# Altium PCB MotherBoard2(1).PcbDoc
Units mil, origin at the board's own origin, x right, y up, seen from the top; angles counter-clockwise.
Board outline 2202.7 x 1707.7 mil, 2 copper layers (Top Layer, Bottom Layer); 42 components, 29 nets, 173 pads, 38 vias.
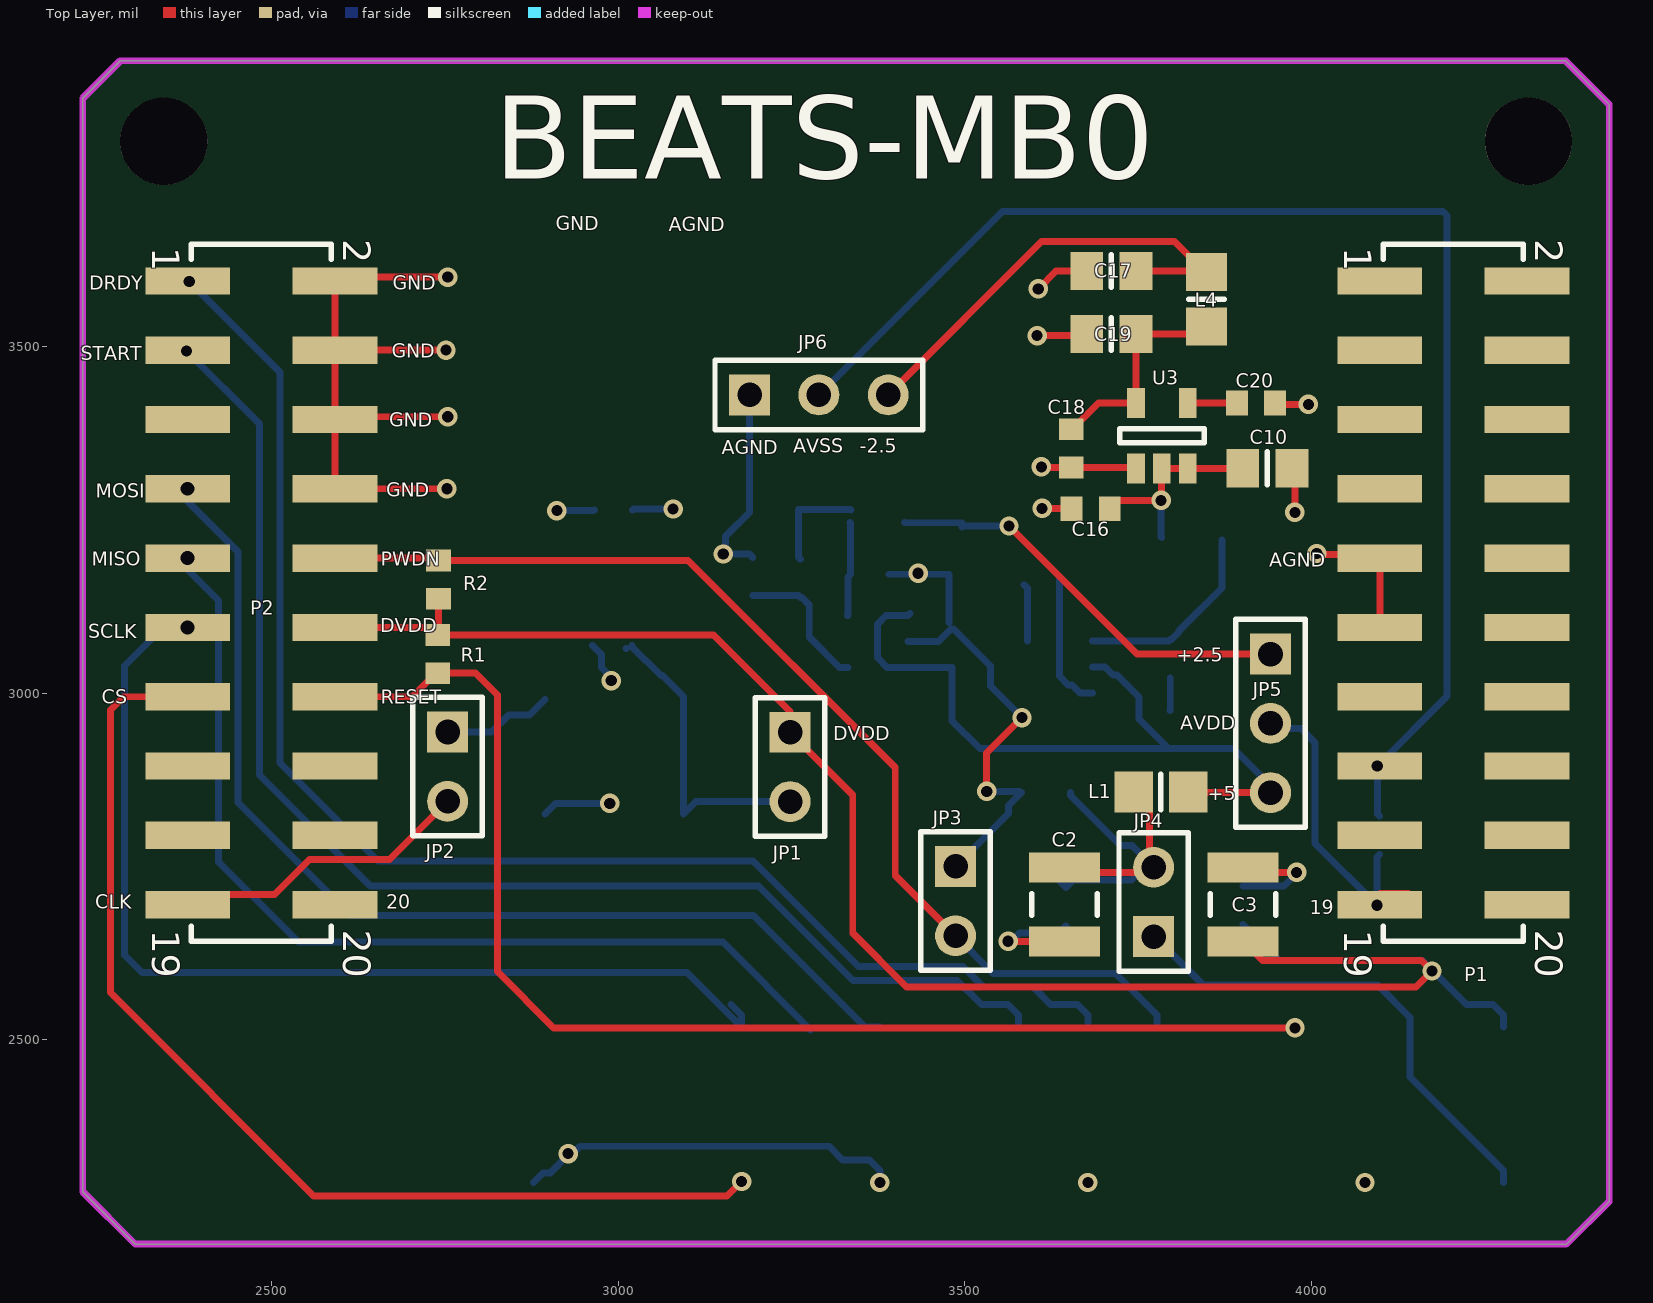
[diagram p0: Top Layer view]
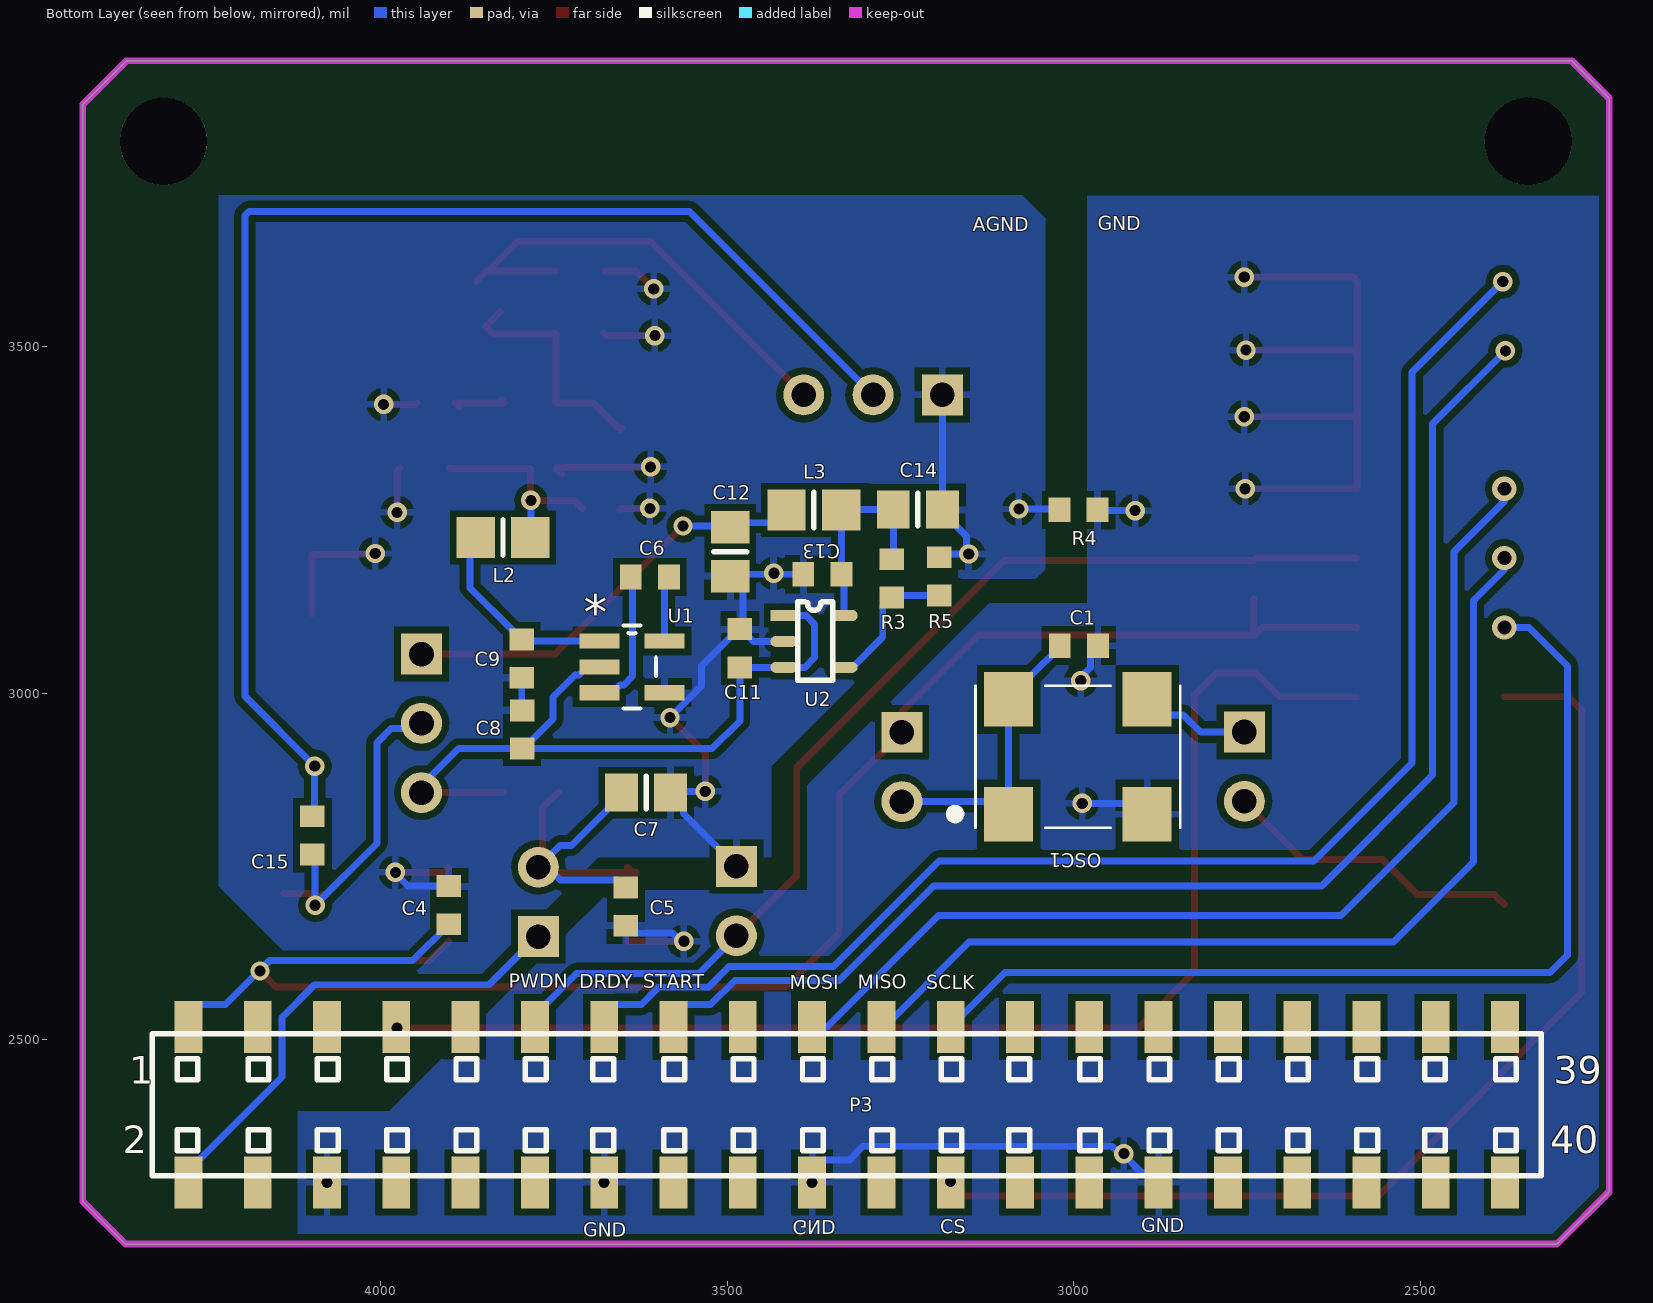
[diagram p1: Bottom Layer view, seen from below]

## Layer stack, top to bottom
Top Solder: solder mask 0.4, Solder Resist, Dk 3.5
Top Layer: signal copper 1.4
Dielectric 1: dielectric 12.6, FR-4, Dk 4.8
Bottom Layer: signal copper 1.4
Bottom Solder: solder mask 0.4, Solder Resist, Dk 3.5

## Board outline
2227.3,2280.7 2227.3,3858.6 2281.4,3912.7 4366.9,3912.7 4430,3849.6 4430,2266.6 4368.4,2205 2303,2205

## Design rules (kind name [scope] priority, off if disabled: settings)
Clearance [All] p1: gap=10 ignorepadtopadclearanceinfootprint=FALSE except(0: Arc-Hole Track-Hole SMDPad-Hole THPad-Hole Via-Hole Fill-Hole Poly-Hole Region-Hole Text-Hole)
PolygonConnect [All] p1: connectstyle=Relief reliefconductorwidth=10 reliefentries=4 polygonreliefangle="90 Angle" airgapwidth=10
RoutingVias [All] p1: holewidth=28 width=50 viastyle="Through Hole" minholewidth=28 minwidth=50 maxholewidth=28 maxwidth=50
SolderMaskExpansion [All] p1: expansion=4
Width [All] p1: maxlimit=10 minlimit=10 preferedwidth=10
30 further rules are at their usual default settings.

## Classes and differential pairs
component class power: C6 C7 C8 C9 C10 C11 C12 C13 C14 C15 C16 C17 C18 C19 C20 JP5 JP6 L3 L4 R3 R4 R5 U3
component class interface2pi: C2 C3 C4 C5 JP3 JP4 P3 R1 R2
component class clock: C1 JP1 JP2

## Components (designator, comment, footprint, x,y, rotation, side; value= is the part's Value field where it differs from the comment)
C1 "Cap" 1608[0603] 2992.6,3068.8 r0 bottom value=1uf
C2 "Cap" 14-1210 3643.7,2695.25 r90 top value=100uF
C3 "Cap" 14-1210 3901.8,2695.2 r270 top value=100uF
C4 "Cap" 1608[0603] 3901.8,2694.14 r270 bottom value=0.1uF
C5 "Cap" 1608[0603] 3646.2,2692.1 r90 bottom value=0.1uF
C6 "Cap" 1608[0603] 3611.8,3167.8 r0 bottom value=1uF
C7 "Cap" 6-0805_N 3617.2,2856.6 r0 bottom value=10uF
C8 "Cap" 1608[0603] 3795.9,2947.66 r270 bottom value=1uF
C9 "Cap" 1608[0603] 3796.5,3049.9 r90 bottom value=1uF
C10 "Cap" 6-0805_N 3936.63,3324.8 r180 top value=10uF
C11 "Cap" 1608[0603] 3481.84,3064.96 r270 bottom value=1uF
C12 "Cap" 6-0805_N 3495.8,3204.3 r90 bottom value=10uF
C13 "Cap" 1608[0603] 3362.8,3171.7 r180 bottom value=2.2uF
C14 "Cap" 6-0805_N 3224.87,3265 r0 bottom value=10uF
C15 "Cap" 1608[0603] 4098.7,2795.01 r270 bottom value=0.1uF
C16 "Cap" 1608[0603] 3681.7,3266.1 r0 top value=2.2uF
C17 "Cap" 6-0805_N 3711.57,3609.2 r0 top value=10uF
C18 "Cap" 1608[0603] 3653.4,3353.46 r90 top value=2.2uF
C19 "Cap" 6-0805_N 3711.6,3518.3 r0 top value=10uF
C20 "Cap" 1608[0603] 3920.26,3418.84 r180 top value=0.01uF
JP1 "Header 2" HDR1X2 3247.9,2943.7 r270 top
JP2 "Header 2" HDR1X2 2753.8,2944.1 r270 top
JP3 "Header 2" HDR1X2 3486.7,2750.1 r270 top
JP4 "Header 2" HDR1X2 3772.6,2648.9 r90 top
JP5 "Jumper" HDR1X3 3941.2,3056.6 r270 top
JP6 "Jumper" HDR1X3 3189.6,3430.5 r0 top
L1 "Inductor" 6-0805_M 3783.13,2857.5 r0 top value=3.3uH
L2 "Inductor" 6-0805_M 3823.6,3224.8 r180 bottom value=3.3uH
L3 "Inductor" 6-0805_M 3375,3264.6 r0 bottom value=3.3uH
L4 "Inductor" 6-0805_M 3848.7,3568.5 r90 top value=3.3uH
OSC1 "FXO-HC735-2.048" FXO-HC736R-40 2994.1,2908.4 r180 bottom
P1 "61002021121" 61002021121 4205,3145.01 r270 top
P2 "Header 10X2" 61002021121 2485,3145.01 r270 top
P3 "MHDR2X20" HDR2.54-M-LS-2x20P 3327.6,2406.2 r180 bottom
R1 "Res1" 1608[0603] 2739.3,3056.5 r90 top value=10k
R2 "Res1" 1608[0603] 2740.6,3164.06 r270 top value=10k
R3 "Res1" 1608[0603] 3262.9,3165.8 r270 bottom value=39.2K
R4 "Res1" 1608[0603] 2993.1,3264.6 r180 bottom value=0
R5 "Res1" 1608[0603] 3194.1,3168.64 r270 bottom value=36.5K
U1 "TPS60403QDBVRQ1" DBV5 3637.4,3038 r180 bottom
U2 "TPS73225DBVRG4" SOT23-5 3418,3112.2 r180 bottom
U3 "TPS72325DBVR" DBV0005A 3784.4,3371.6 r90 top

## Footprints (in the part's own frame and the unit in brackets; to place one, negate y for a bottom-side part, rotate by r counter-clockwise, add the part's x,y. Pads: shape width x height; smd on the part's side, far side on the other; paste and mask are expansions set on the pad)
6-0805_M [mm] "Chip Resistor, Body 2.0x1.2mm, IPC Low Density"
  rect 1.4x1.5 smd: 1(-1,0) 2(1,0)
  silkscreen extent 0,-0.65 0,0.65, body extent -1.07,-0.7 1.07,0.7, height 0.7
6-0805_N [mm] "Chip Resistor, Body 2.0x1.2mm, IPC Medium Density"
  rect 1.2x1.4 smd: 1(-0.9,0) 2(0.9,0)
  silkscreen extent 0,-0.6 0,0.6, body extent -1.07,-0.7 1.07,0.7, height 0.7
14-1210 [mm] "Chip Resistor, Body 3.2x2.5mm, IPC High Density"
  rect 1.1x2.6 smd: 1(-1.35,0) 2(1.35,0)
  silkscreen extent -0.4,-1.2 0.4,1.2, body extent -1.68,-1.32 1.68,1.32, height 0.9
1608[0603] [mm] "Chip Capacitor, Body 1.6x0.8mm, IPC High Density"
  rect 0.8x0.9 smd: 1(-0.7,0) 2(0.7,0)
  body extent -0.87,-0.48 0.87,0.48, height 1.3
61002021121 [mm] "Pin Header, pitch 2.54 mm, SMD, Vertical, dual row, 20p"
  rect 1x3.1 smd: 1(-11.43,-2.7) 2(-11.43,2.7) 3(-8.89,-2.7) 4(-8.89,2.7) 5(-6.35,-2.7) 6(-6.35,2.7) 7(-3.81,-2.7) 8(-3.81,2.7) 9(-1.27,-2.7) 10(-1.27,2.7) 11(1.27,-2.7) 12(1.27,2.7) 13(3.81,-2.7) 14(3.81,2.7) 15(6.35,-2.7) 16(6.35,2.7) 17(8.89,-2.7) 18(8.89,2.7) 19(11.43,-2.7) 20(11.43,2.7)
  silkscreen extent -12.78,-2.56 12.78,2.57, body extent -12.7,-3.75 12.7,3.75, height 9.62
DBV5 [mil]
  rect 58x22 smd: 1(-47,37.4) 2(-47,0) 3(-47,-37.4) 4(47,-37.4) 5(47,37.4)
  silkscreen extent -12,-60 34,60, body extent -59,-60 59,60, height 57
DBV0005A [mm]
  rect 1.1x0.65 smd paste-0.102 mask+0.051: 1(-1.2,0.95) 2(-1.2,0) 3(-1.2,-0.95) 4(1.2,-0.95) 5(1.2,0.95)
  silkscreen extent -0.25,-1.55 0.25,1.55, body extent 0,0 0.25,0.25, height 0.25
FXO-HC736R-40 [mm]
  rect 1.8x2 smd: 1(-2.54,-2.1) 2(2.54,-2.1) 3(2.54,2.1) 4(-2.54,2.1)
  silkscreen extent -4.64,-2.6 3.75,2.6
HDR1X2 [mm] "Connector; Header; 2 Position"
  rect 1.5x1.5 hole 0.9: 1(0,0)
  round 1.5 hole 0.9: 2(2.54,0)
  silkscreen extent -1.27,-1.27 3.81,1.27
HDR1X3 [mm] "Connector; Header; 3 Position"
  rect 1.5x1.5 hole 0.9: 1(0,0)
  round 1.5 hole 0.9: 2(2.54,0) 3(5.08,0)
  silkscreen extent -1.27,-1.27 6.35,1.27
HDR2.54-M-LS-2x20P [mm] "脚距：2.54mm，贴片双排母"
  rect 1.02x1.9 smd: 1(-24.13,2.85) 2(-24.13,-2.85) 3(-21.59,2.85) 4(-21.59,-2.85) 5(-19.05,2.85) 6(-19.05,-2.85) 7(-16.51,2.85) 8(-16.51,-2.85) 9(-13.97,2.85) 10(-13.97,-2.85) 11(-11.43,2.85) 12(-11.43,-2.85) 13(-8.89,2.85) 14(-8.89,-2.85) 15(-6.35,2.85) 16(-6.35,-2.85) 17(-3.81,2.85) 18(-3.81,-2.85) 19(-1.27,2.85) 20(-1.27,-2.85) 21(1.27,2.85) 22(1.27,-2.85) 23(3.81,2.85) 24(3.81,-2.85) 25(6.35,2.85) 26(6.35,-2.85) 27(8.89,2.85) 28(8.89,-2.85) 29(11.43,2.85) 30(11.43,-2.85) 31(13.97,2.85) 32(13.97,-2.85) 33(16.51,2.85) 34(16.51,-2.85) 35(19.05,2.85) 36(19.05,-2.85) 37(21.59,2.85) 38(21.59,-2.85) 39(24.13,2.85) 40(24.13,-2.85)
  silkscreen extent -25.46,-2.6 25.46,2.6, body extent -25.43,-3.2 25.43,3.2, height 5.15
SOT23-5 [mm]
  rect 1x0.4 smd: 1(0,0)
  oval 1x0.4 smd: 2(0,-0.95) 3(0,-1.9) 4(2.2,-1.9) 5(2.2,0)
  silkscreen extent 0.51,-2.38 1.78,0.51, body extent -0.26,-2.34 2.54,0.56, height 1.2

## Part data
C1 C2 C3 C4 C5 C6 C7 C8 C9 C10 C11 C12 C13 C14 C15 C16 C17 C18 C19 C20: "Capacitor", LatestRevisionDate=17-Jul-2002, LatestRevisionNote="Re-released for DXP Platform.", PackageDescription="Radial Cap, Thru-Hole; 2 Leads; 0.3 in Pin Spacing", PackageReference=RAD-0.3, Published=8-Jun-2000, Publisher="Altium Limited"
JP1 JP2 JP3 JP4: "Header, 2-Pin", LatestRevisionDate=17-Jul-2002, LatestRevisionNote="Re-released for DXP Platform.", Publisher="Altium Limited"
JP5 JP6: library part "Header 3", "Header, 3-Pin", LatestRevisionDate=17-Jul-2002, LatestRevisionNote="Re-released for DXP Platform.", Publisher="Altium Limited"
OSC1: "Crystal or Oscillator", Manufacturer_Name=IDT, Mouser Part Number=XPO-HC735-2.048, Datasheet Link=https://media.digikey.com/pdf/Data%20Sheets/Renesas/R7F7010293AFP_Web.pdf, Manufacturer_Part_Number=FXO-HC735-2.048, Mouser Price/Stock=https://www.mouser.com/Search/Refine.aspx?Keyword=XPO-HC735-2.048
P1: "SMT Vertical Pin Header WR-PHD, Pitch 2.54 mm, Dual Row, 20 pins", Contact Resistance="20 mOhm", Operating Temperature="-40 to 125 degC", Rated Current="3 A", Withstanding Voltage="500 VAC", Working Voltage="250 VAC", ComponentLink1Description=Manufacturer, ComponentLink1URL=http://www.we-online.de, ComponentLink2Description=Datasheet, ComponentLink2URL=https://katalog.we-online.de/em/datasheet/6100xx21121.pdf, Gender=Male, Mounting Technology=SMT, Orientation=Vertical, Packaging=Tube, Part Number=61002021121, Pin Number=20, Pitch="2.54 mm", Published Date="August 2018", Publisher="Wurth Elektronik", Row Number=Dual
P2: "Header, 10-Pin, Dual row", LatestRevisionDate=17-Jul-2002, LatestRevisionNote="Re-released for DXP Platform.", Publisher="Altium Limited"
P3: "Header, 20-Pin, Dual row", LatestRevisionDate=17-Jul-2002, LatestRevisionNote="Re-released for DXP Platform.", Publisher="Altium Limited"
R1 R2 R3 R4 R5: "Resistor", LatestRevisionDate=17-Jul-2002, LatestRevisionNote="Re-released for DXP Platform.", PackageDescription="Axial Device, Thru-Hole; 2 Leads; 0.3 in Pin Spacing", PackageReference=AXIAL-0.3, Published=8-Jun-2000, Publisher="Altium Limited"
U1: BOM_LCSC Assembly=Yes, BOM_Manufacturer=TI, BOM_Manufacturer Part=TPS60403QDBVRQ1, BOM_Supplier=LCSC, BOM_Supplier Part=C130215, Contributor=LCSC, SMT Type=Extend, spicePre=U, spiceSymbolName=TPS60403QDBVRQ1
L1 L2 L3 L4: Code_IEC=1005, Code_JEITA=0402, LatestRevisionDate=29-May-2009, LatestRevisionNote="IPC-7351 Footprint Added.", PackageDescription="Chip Inductor", PackageReference=0402-A, Published=8-Jun-2000, Publisher="Altium Limited"
U2: spicePre=U, spiceSymbolName=TPS73225DBVRG4

## Free pads (board coordinates)
  round 125.98 hole 125.98 unplated: 4(4313.4,3796.5) 5(2344.2,3796.5)

## Via types
v1: diameter 28, hole 16, Top Layer to Bottom Layer, 35 vias
v2: diameter 35, hole 20, Top Layer to Bottom Layer, tented both sides, 3 vias

## Nets (pads, with @x,y where several pads share a name; then routed paths per layer and width w, separated by ;. In a path a pad name is that pad's centre, name@x,y a point inside that pad or via, vN(x,y) a via of type N, cw(c..) or ccw(c..) an arc to the next point about the centre after c; other vN are vias at no path point)
+5: C2.2 C5.2 C7.2 JP4.2 L1.1 | length 600.9
  Top Layer w10: C2.2 C2.2@3636.4,2741.1 ; L1.1 3766.32,2834.94 3766.32,2755.18 JP4.2 JP4.2@3773.11,2749.41 ; JP4.2@3772.6,2741.1 C2.2@3636.4,2741.1 ; C2.2@3636.4,2741.1 3633.8,2738.5 3631.2,2741.1 C2.2@3636.4,2741.1
  Bottom Layer w10: C5.2@3635.45,2730.41 C5.2 3656.95,2730.41 3740.83,2730.41 3759.33,2748.9 JP4.2 3741.11,2780.39 3724.91,2780.39 3652.63,2852.66 C7.2
-5: C10.2 C16.2 L2.2 U3.2 U3.3 | length 305
  Top Layer w10: C16.2@3714.69,3271.53 C16.2 3709.26,3267.55 3720.01,3278.3 v1(3783.3,3278.3) 3783.85,3278.85 3783.85,3323.81 U3.2 U3.3 3900.76,3324.36 C10.2
  Bottom Layer w10: v1(3783.3,3278.3) 3783.3,3225.73 L2.2
AGND: C3.1 C4.1 C7.1 C8.1 C9.1 C10.1 C11.1 C12.1 C13.1 C14.1 C16.1 C17.1 C18.1 C19.1 C20.1 JP3.1 JP6.1 P1.9 P1.11 R4.1 R5.1 U1.4 U2.2 U3.1 | length 1953.6
  Top Layer w10: v1(3189.6,3430.5) JP6.1@3206.41,3447.31 ; v1(3531.7,2858.4) 3531.7,2914 v1(3582.6,2964.9) ; v1(3604.4,3516) 3673.87,3516 C19.1 C19.1@3677.74,3519.87 ; v1(3606.1,3583.6) 3631.7,3609.2 C17.1 ; v1(3610.6,3326.7) 3611.4,3325.9 C18.1 3745.45,3325.9 U3.1 U3.1@3739.2,3316.56 ; v1(3611.6,3266.8) 3653.44,3266.8 C16.1@3655.84,3264.4 ; C3.1 3908.55,2741.6 v1(3978.8,2741.6) ; C20.1 3949.76,3416.9 v1(3995.9,3416.9) ; C10.1 3976.3,3320.57 v1(3976.3,3261.1) ; v1@4007.8,3206.2 4013.66,3200.34 4098.46,3200.34 4099.4,3199.4 4099.4,3115.39
  Bottom Layer w10: R4.1 3021.96,3265.9 v1(3079.1,3265.9) ; v1(3189.6,3430.5) 3189.6,3265.17 C14.1 3189.43,3261.06 3154.94,3226.57 3154.94,3204.34 v1(3151.5,3200.9) 3189.4,3200.9 R5.1 ; C13.1 3477.05,3171.7 C11.1@3477.05,3102.41 ; U2.2 3462.16,3074.8 3479.87,3092.52 C11.1 3483.81,3092.52 3536.86,3039.47 3536.86,3010.64 v1(3582.6,2964.9) ; JP3.1 3563.14,2826.54 3563.14,2837.98 C7.1 3579.97,2858.4 v1(3531.7,2858.4) ; C8.1 3796.5,2975.82 C9.1 ; C4.1 3960.6,2721.7 v1@3982.55,2743.65
  other v1: 3432.8,3173.2 4007.9,3201.7
AVDD: C15.2 JP5.2 P1.19 | length 484.5
  Top Layer w10: P1.19@4084.02,2709.7 P1.19 ; P1.19@4099,2711 P1.19@4140.34,2711
  Bottom Layer w10: JP5.2 3948.7,2949.1 3985,2949.1 4005.5,2928.6 4005.5,2783.3 v1(4094.7,2694.1) 4094.7,2763.45 C15.2
AVSS: C15.1 JP6.2 P1.15 | length 1937.7
  Top Layer w10: P1.15@4092.39,2888.7 P1.15
  Bottom Layer w10: JP6.2 3554.5,3695.4 4190.24,3695.4 4196.1,3689.54 4196.1,2995.7 v1(4095.3,2894.9) 4095.3,2825.97 C15.1
DVDD: C3.2 C4.2 JP1.1 P2.12 P3.1 R1.2 R2.2 | length 2732.5
  Top Layer w10: P2.12@2591.58,3095.3 P2.12 2591.51,3094.81 2728.55,3094.81 R1.2 ; R2.2 2740.6,3085.36 R1.2 ; C3.2 3929.65,2614.2 4159.2,2614.2 v1(4174.2,2599.2) 4151.1,2576.1 3416.2,2576.1 3338.4,2653.9 3338.4,2853.2 JP1.1 3247.9,2973.6 3137.44,3084.06 R1.2
  Bottom Layer w10: C4.2 3954.18,2614.2 4160.49,2614.2 4223.89,2550.8 4262.52,2550.8 4277.6,2535.72 P3.1
GND: C1.1 C2.1 C5.1 OSC1.2 P2.2 P2.4 P2.6 P2.8 P3.6 P3.14 P3.20 P3.30 R4.2 | length 1896.7
  Top Layer w10: v1(2751.5,3495.2) 2591.49,3495.2 P2.4 ; v1(2752.8,3295.1) 2591.39,3295.1 P2.8 P2.6 ; v1(2754,3399) 2595.29,3399 P2.6 ; v1(2754,3600.4) 2596.69,3600.4 P2.2 P2.4 ; v1(3562.7,2642.1) 3643.1,2642.1 3643.4,2642.4 C2.1 ; P2.6 P2.4
  Bottom Layer w10: P3.30 2891.6,2307.99 2901.89,2307.99 2927.6,2333.7 v1(2927.6,2335.65) 2934.42,2335.65 2945.16,2346.39 3303.89,2346.39 3323.89,2326.39 3362.52,2326.39 3377.6,2311.31 v1(3377.6,2293.99) ; OSC1.2 2909.58,2841.2 v1(2987.8,2841.2) ; v1(2911.4,3263.5) 2964.44,3263.5 R4.2 ; C1.1@2962.5,3068.8 2963.07,3068.8 2975.79,3056.08 2975.79,3037.28 2989.9,3023.17 v1(2989.9,3018.3) ; v1(3562.7,2642.1) 3567.57,2642.1 3579.26,2653.79 3635.45,2653.79 C5.1
  other v1: 3677.6,2293.99 4077.6,2293.99
NetC1_2: C1.2 JP1.2 OSC1.1 OSC1.4 | length 441.4
  Bottom Layer w10: C1.2@3011.06,3064.5 C1.2@3011.84,3064.5 ; C1.2 3020.16,3066.83 3061.54,3025.45 3063.67,3025.45 3094.1,2995.01 OSC1.4 OSC1.1 3112.08,2843.7 JP1.2 JP1.2@3244.75,2840.55
NetC6_1: C6.1 U1.5 | length 83.2
  Bottom Layer w10: C6.1@3585.5,3156.6 3590.4,3151.7 U1.5
NetC6_2: C6.2 U1.3 | length 201
  Bottom Layer w10: C6.2@3636.5,3167.8 3636.5,3024.69 3649.19,3012 3655,3012 3666.4,3000.6 U1.3
NetC8_2: C8.2 C11.2 JP5.3 L1.2 U1.2 U2.1 U2.3 | length 1097.1
  Top Layer w10: L1.2 3823.4,2856.6 JP5.3
  Bottom Layer w10: U2.1@3420.87,3115.08 U2.1 3386.5,3112.2 3373.9,3099.6 3373.9,3051.6 3388.1,3037.4 U2.3 C11.2 3481.84,2960.06 3521.8,2920.1 C8.2@3793.93,2920.1 ; U1.2 3702.4,3038 3713.8,3026.6 3719.61,3026.6 3751.4,2994.81 3751.4,2962.63 C8.2@3793.93,2920.1 ; JP5.3 3941.2,2866.9 3888,2920.1 C8.2 C8.2@3793.93,2920.1
NetC9_2: C9.2 L2.1 U1.1 | length 288.4
  Bottom Layer w10: U1.1 3794.44,3075.4 C9.2 3798.47,3077.46 3809.22,3088.21 3809.22,3090.18 3871.1,3152.06 L2.1@3871.1,3220.9
NetC12_2: C12.2 JP5.1 L3.2 | length 605.7
  Top Layer w10: v1(3563.8,3241.3) 3748.5,3056.6 JP5.1
  Bottom Layer w10: L3.2@3412.87,3246.6 3413.47,3246 C12.2@3495.8,3246 ; C12.2 3497.37,3241.3 v1(3563.8,3241.3)
NetC13_2: C13.2 C14.2 L3.1 R3.1 U2.5 | length 285.2
  Bottom Layer w10: R3.1 3260.3,3195.96 C14.2 3335.23,3265 L3.1 ; U2.5@3330.99,3111.81 U2.5 3331.39,3167.84 C13.2 3335.24,3245.49 L3.1@3334.13,3246.6
NetC17_2: C17.2 JP6.3 L4.2 | length 687.1
  Top Layer w10: JP6.3 3610.86,3651.76 3802.84,3651.76 L4.2@3845.4,3609.2 ; C17.2 L4.2@3845.4,3609.2 ; L4.2@3862.65,3593.92 L4.2 3847.37,3609.2 L4.2@3845.4,3609.2
NetC18_2: C18.2 C19.2 L4.1 U3.5 | length 348
  Top Layer w10: C18.2@3651.63,3382.79 C18.2 3655.37,3381.02 3693.19,3418.84 U3.5 C19.2 ; C19.2 3837.87,3518.3 L4.1 L4.1@3827.05,3550.78
NetC20_2: C20.2 U3.4 | length 86.2
  Top Layer w10: U3.4@3826.53,3423.57 U3.4 C20.2 C20.2@3886.6,3412.74
NetJP2_1: JP2.1 OSC1.3 | length 159.8
  Bottom Layer w10: JP2.1 2817.3,2944.1 2841.98,2968.78 2871.8,2968.78 OSC1.3
NetJP2_2: JP2.2 P2.19 | length 450.1
  Top Layer w10: P2.19 2393.39,2709.7 2504.06,2709.7 2554.69,2760.33 2670.03,2760.33 JP2.2 JP2.2@2753.8,2830.83
NetJP3_2: JP3.2 P2.10 P3.11 R2.1 | length 1567.8
  Top Layer w10: P2.10 2737.2,3195.01 R2.1 3100.68,3191.62 3399.7,2892.6 3399.7,2737.1 JP3.2
  Bottom Layer w10: JP3.2 3541.04,2595.76 3717.57,2595.76 3777.6,2535.72 P3.11
NetJP4_1: JP4.1 P3.2 | length 710.9
  Bottom Layer w10: JP4.1@3774.2,2649.1 3843.9,2579.4 4095.29,2579.4 4142.52,2532.17 4142.52,2446.39 4277.6,2311.31 P3.2
NetP2_1: P2.1 P3.13 | length 2082.4
  Bottom Layer w10: v1(2381,3594.1) 2511.9,3463.2 2511.9,2899.66 2653.66,2757.9 3194.67,2757.9 3347,2605.57 3497.41,2605.57 3527.22,2575.76 3598.94,2575.76 3623.89,2550.8 3662.52,2550.8 3677.6,2535.72 P3.13
NetP2_3: P2.3 P3.15 | length 1911.8
  Bottom Layer w10: v1(2377.2,3494.1) 2482.4,3388.9 2482.4,2881.76 2642.16,2722 3202.28,2722 3338.71,2585.57 3489.12,2585.57 3523.89,2550.8 3562.52,2550.8 3577.6,2535.72 P3.15
NetP2_7: P2.7 P3.19 | length 1543
  Bottom Layer w10: v2(2378.7,3295.01) 2378.7,3277.1 2451.6,3204.2 2451.6,2842.5 2614.5,2679.6 3195.09,2679.6 3356.29,2518.4 P3.19
NetP2_9: P2.9 P3.21 | length 1414.9
  Bottom Layer w10: v2(2378.7,3195.01) 2378.7,3178.3 2423.4,3133.6 2423.4,2756.5 2538.8,2641.1 3150.86,2641.1 3277.71,2514.25 P3.21@3275.62,2516.73
NetP2_11: P2.11 P3.23 | length 1503.5
  Bottom Layer w10: v2(2378.7,3095.01) 2343.01,3095.01 2287.4,3039.4 2287.4,2622 2312.5,2596.9 3099.1,2596.9 P3.23 3177.6,2535.72 P3.23@3162.52,2550.8
NetP2_13: P2.13 P3.24 | length 1568
  Top Layer w10: P2.13 2286.51,2995.01 2267.3,2975.8 2267.3,2567.9 2560.5,2274.7 3157.2,2274.7 v1(3178,2295.5)
NetP2_14: P2.14 P3.7 R1.1 | length 1845.1
  Top Layer w10: P2.14 2703.4,2995.01 2737.33,3028.94 R1.1 2794.26,3028.94 2825.9,2997.3 2825.9,2598.2 2906.9,2517.2 v1(3976.6,2517.2)
NetR3_2: R3.2 R5.2 U2.4 | length 207.3
  Bottom Layer w10: R5.2 3260.06,3141.08 R3.2 3264.87,3138.24 3275.62,3127.49 3275.62,3081.36 3319.57,3037.4 U2.4
pads on no net: P1.1 P1.2 P1.3 P1.4 P1.5 P1.6 P1.7 P1.8 P1.10 P1.12 P1.13 P1.14 P1.16 P1.17 P1.18 P1.20 P2.5 P2.15 P2.16 P2.17 P2.18 P2.20 P3.3 P3.4 P3.5 P3.8 P3.9 P3.10 P3.12 P3.16 P3.17 P3.18 P3.22 P3.25 P3.26 P3.27 P3.28 P3.29 P3.31 P3.32 P3.33 P3.34 P3.35 P3.36 P3.37 P3.38 P3.39 P3.40

## Polygon pours and split planes (outlines as drawn)
GND on Bottom Layer "Bottom Layer-GND" (solid, remove dead copper, pour order 6): 2980.2,3718.2 2980.2,3129.9 3122,3129.9 3384.6,2867.3 3384.6,2716 3668.3,2716 3987.6,2396.7 4120,2396.7 4120,2207.6 4117.4,2205 2227.3,2205 2227.3,3678 2227.3,3718.2
AGND on Bottom Layer "Bottom Layer-AGND" (solid, remove dead copper, pour order 8): 3040.8,3680.25 3040.8,3179.3 3054.9,3165.2 3166,3165.2 3436.7,2894.5 3436.7,2763.2 3686.1,2763.2 3854,2595.3 4113.2,2595.3 4113.2,2601 4233.7,2721.5 4233.7,3718.3 3074,3718.3 3039.6,3683.9

## Keep-outs
Keep-Out Layer:
  the board outline again, w10

## Silkscreen, mask and mechanical layers (free items; w line width, h text height)
Top Overlay:
  text "BEATS-MB0" at 2821.3,3742.5 h120
  text "GND" at 2909.8,3668.4 h20
  text "AGND" at 3072.7,3666.6 h20
  text "DRDY" at 2236.5,3582 h20
  text "GND" at 2674.4,3582 h20
  text "GND" at 2673.2,3484 h20
  text "START" at 2224.7,3480.5 h20
  text "GND" at 2669.7,3384.9 h20
  text "AVSS" at 3252.3,3346.8 h20
  text "-2.5" at 3348.8,3346.9 h20
  text "AGND" at 3149.1,3344.9 h20
  text "GND" at 2665,3283.4 h20
  text "MOSI" at 2245.9,3282.2 h20
  text "MISO" at 2240,3184.2 h20
  text "PWDN" at 2657.3,3183.9 h20
  text "AGND" at 3939.7,3182.6 h20
  text "DVDD" at 2656.3,3087.9 h20
  text "SCLK" at 2235.3,3079.2 h20
  text "+2.5" at 3805.7,3045.4 h20
  text "CS" at 2255,2985 h20
  text "RESET" at 2657.3,2984.7 h20
  text "AVDD" at 3810.7,2947.4 h20
  text "DVDD" at 3310.6,2932.1 h20
  text "+5" at 3850.9,2845.6 h20
  text "CLK" at 2245,2688.71 h20
  text "20" at 2665,2688.71 h20
  text "19" at 3997.8,2681.2 h20
Bottom Overlay:
  text "GND" at 2965.3,3668.4 h20
  text "AGND" at 3146.1,3666.6 h20
  text "PWDN" at 3815.4,2575 h20
  text "MISO" at 3311.4,2573.7 h20
  text "START" at 3621.3,2574.4 h20
  text "DRDY" at 3713.9,2574.4 h20
  text "SCLK" at 3213.2,2573.1 h20
  text "MOSI" at 3409.6,2573.1 h20
  text "GND" at 3405.8,2239.7 h20 r180
  text "GND" at 2902.5,2221.9 h20
  text "CS" at 3192.9,2220.3 h20
  text "GND" at 3707.5,2215.5 h20

## Text inside footprints (layer, text, board x,y; h text height)
P1: Top Overlay "20" at 4323.11,2658.4 h40 r270; Top Overlay "19" at 4047.52,2658.4 h40 r270; Top Overlay "2" at 4323.11,3655.25 h40 r270; Top Overlay "1" at 4047.52,3643.44 h40 r270
P2: Top Overlay "1" at 2327.52,3643.44 h40 r270; Top Overlay "2" at 2603.11,3655.25 h40 r270; Top Overlay "19" at 2327.52,2658.4 h40 r270; Top Overlay "20" at 2603.11,2658.4 h40 r270
P3: Bottom Overlay "40" at 2312.6,2336.2 h40; Bottom Overlay "39" at 2307.6,2436.2 h40; Bottom Overlay "1" at 4362.6,2436.2 h40; Bottom Overlay "2" at 4372.6,2336.2 h40
U1: Mechanical 13 "*" at 3706.9,3092.4 h50; Bottom Overlay "*" at 3706.9,3092.4 h50